# EAGLE board Gibbot v3.b#1 (EAGLE 5.12), part 1 of 2
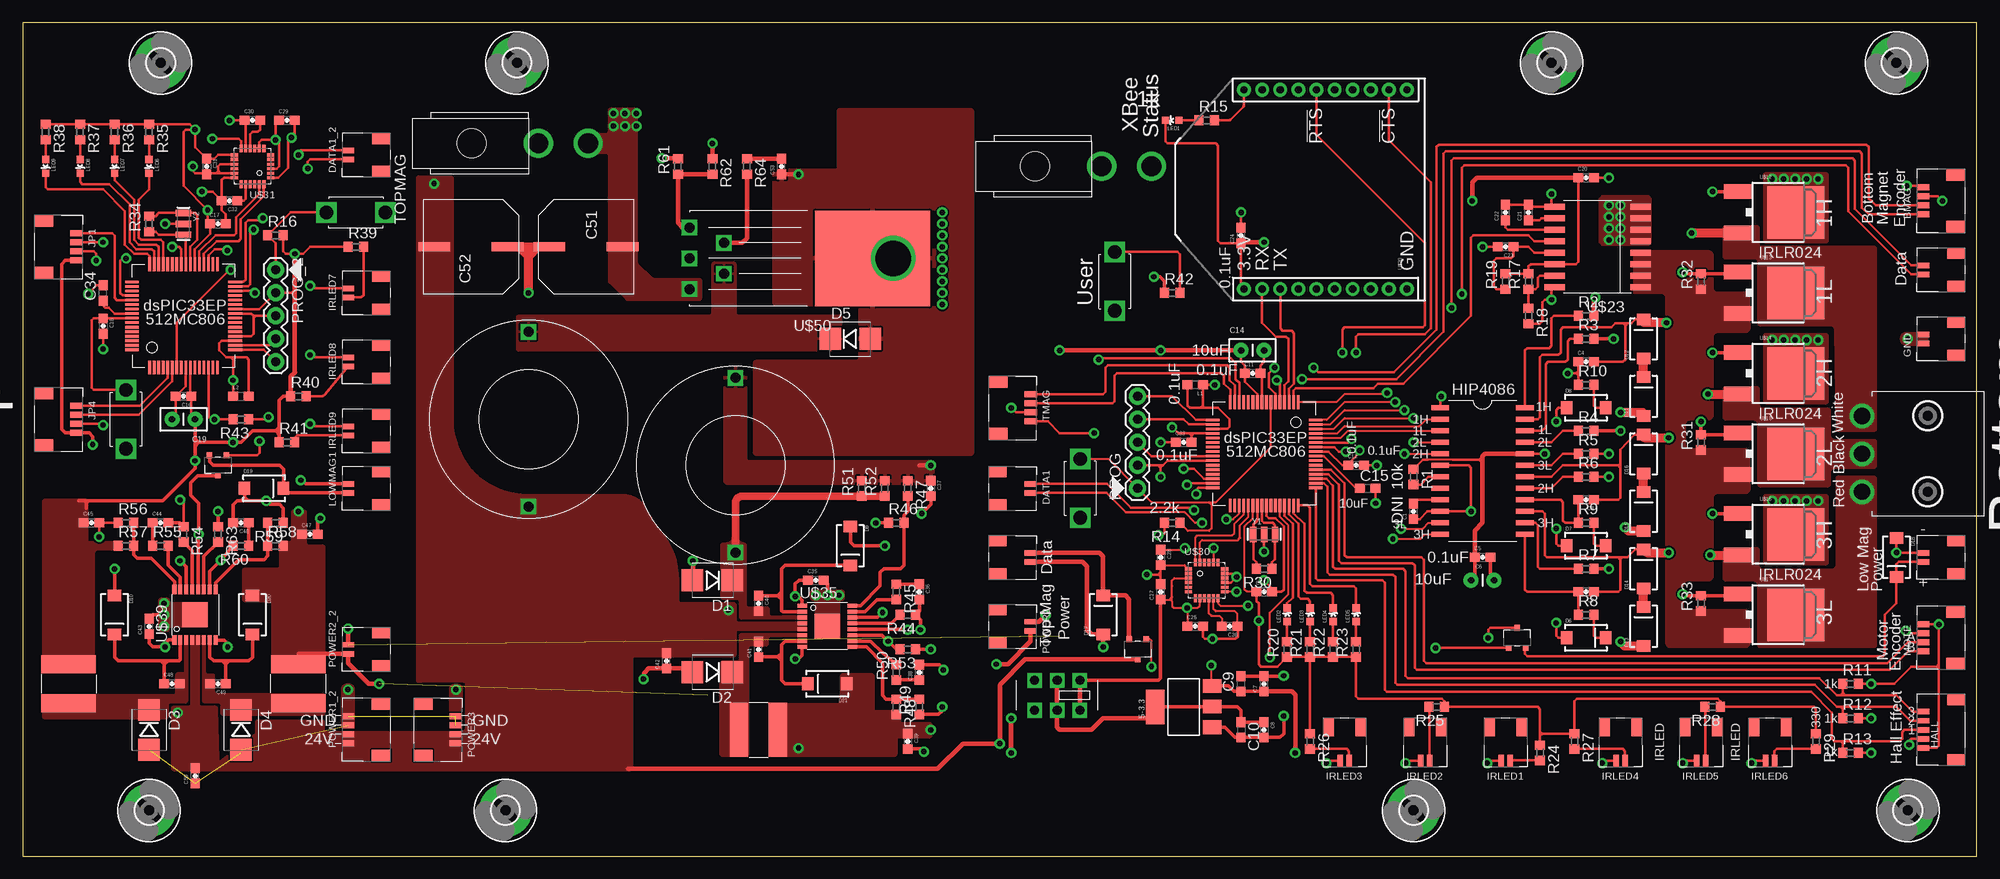
[diagram p0: board, top side]
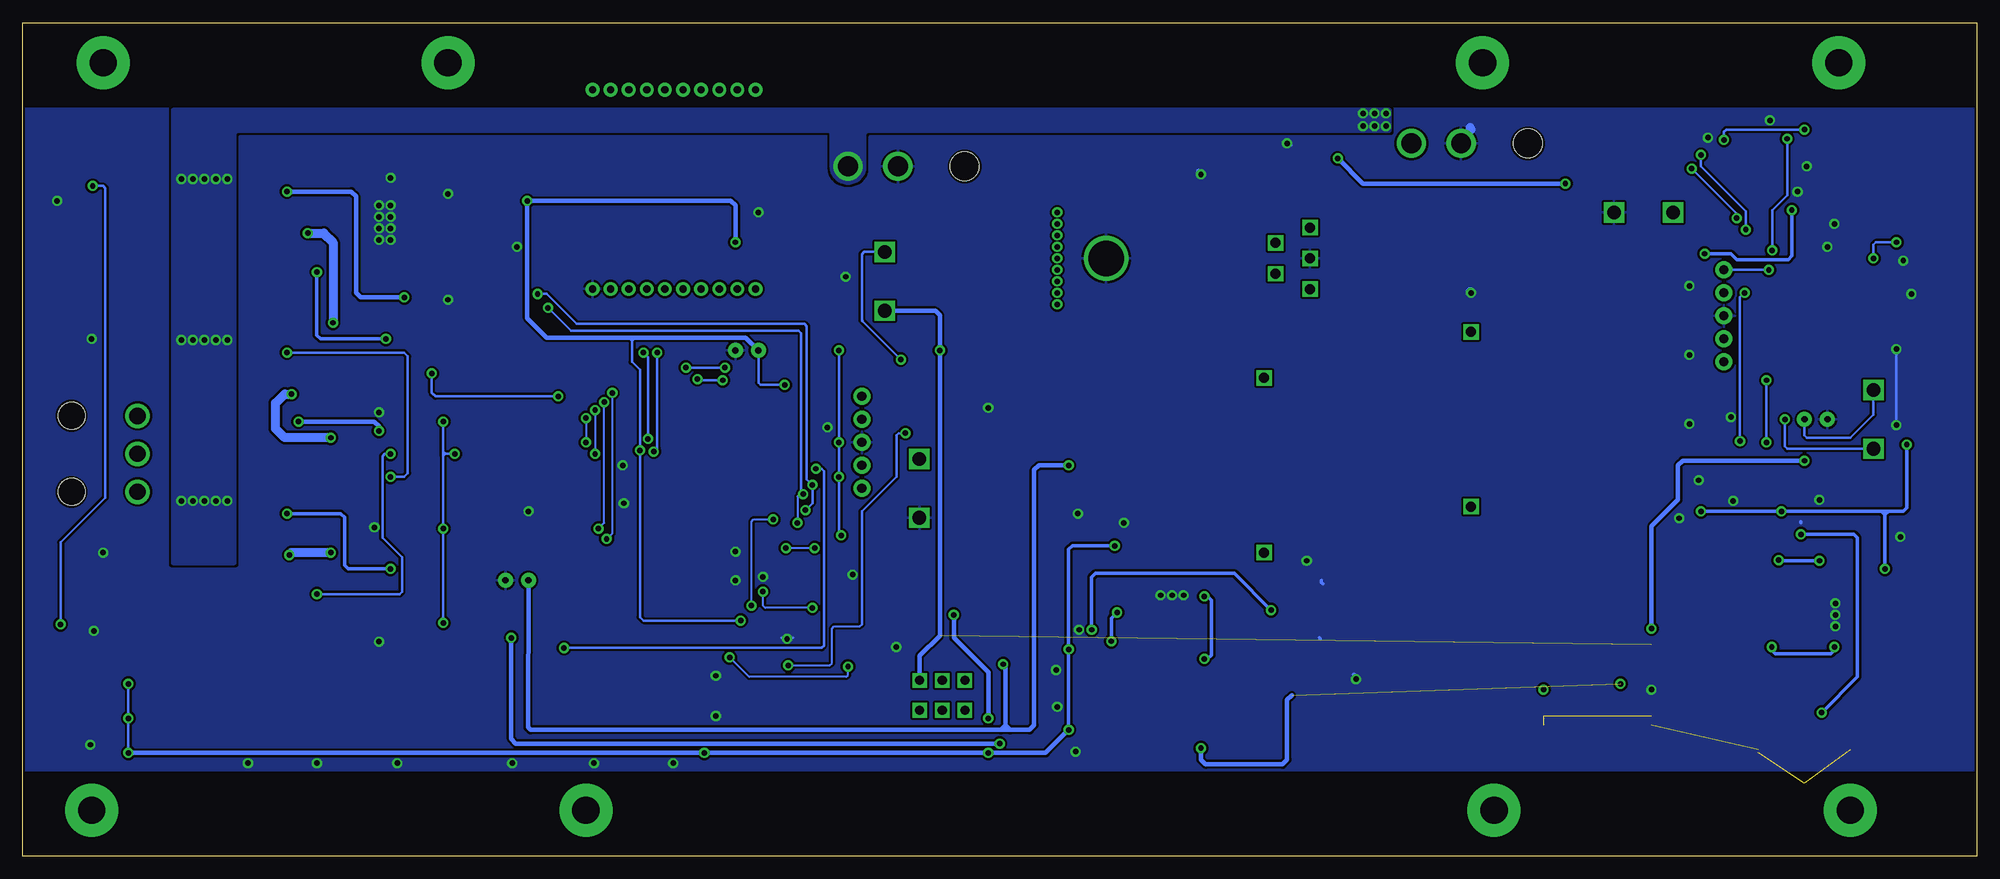
[diagram p1: board, bottom side, seen from below]

Size 215.9 x 92.08 mm. Coordinates in mm from the lower left corner, seen from the top.
Outline: 0,0 215.9,0 215.9,92.08 0,92.08 0,0
Copper layers (1*16): Top 0.035mm / dielectric 1.5mm / Bottom 0.035mm
Design rules "SparkFun": minimum track width 8mil, minimum drill 20mil, track to track 8mil, track to pad 8mil, pad to pad 8mil, via to via 8mil, smd to smd 8mil, copper to edge 10mil, drill to drill 8mil, minimum pad ring 12mil, minimum via ring 10mil, stop-mask expansion 4mil, vias tented up to drill 25mil, thermal gap 10mil
tKeepout: area 0,0 to 214.6,9.5
bKeepout: area 0,82.5 to 214.6,92.1

## Footprints (pad centres in the part's own frame; a part is rotated, then mirrored left to right if it is on the bottom)
SOT223 = smd 1.499 x 2.007: 1 -2.261,-3.15; 2 0.025,-3.15; 3 2.311,-3.15 | smd 3.81 x 2.007: 4 0,3.15
JST-SH-4 = smd 0.65 x 1.36: 1 -1.5,4.68; 2 -0.5,4.68; 3 0.5,4.68; 4 1.5,4.68 | smd 1.3 x 2.1: P$5 2.85,1.05; P$6 -2.85,1.05
SOT23F = smd 0.6 x 0.65: D 0,1.125; G -0.95,-1.125; S 0.95,-1.125
0603-CAP = smd 1.1 x 1: 1 -0.85,0; 2 0.85,0
CAP-PTH-SMALL = drill 0.7 pad 1.651 round: 1 0,0; 2 2.54,0
C0603 = smd 1.1 x 1: 1 -0.85,0; 2 0.85,0
CAP-PTH-SMALL2 = drill 0.7 pad 1.651 round: 1 0,0; 2 2.54,0
EEH-ZA1H101P = smd 1 x 3.5: P$1 0,-4.05; P$2 0,4.05
SMB-DIODE = smd 2.4 x 2.4: A 2.2,0; C -2.2,0
SMA-DIODE = smd 1.27 x 1.47: A -2.15,0; C 2.15,0
JST-SH-2 = smd 0.6 x 1.35: 1 0.5,4.675; 2 -0.5,4.675 | smd 1.2 x 2: P$6 -1.8,1; P$7 1.8,1
3,0-PAD = drill 3 pad 5.842 round: B3,0 0,0
JST-SH-5 = smd 0.6 x 1.35: 1 2,4.675; 2 1,4.675; 3 0,4.675; 4 -1,4.675; 5 -2,4.675 | smd 1.2 x 2: P$6 -3.3,1; P$7 3.3,1
0603 = smd 1.1 x 1: 1 -0.85,0; 2 0.85,0
2100LL-181 = drill 1.1 square: 1 0,9.652; 2 0,-9.652
SRN6045 = smd 2 x 6: P$1 -2.15,0; P$2 2.15,0
LED-0603 = smd 0.8 x 0.8: A 0,-0.75; C 0,0.75
TACTILE_SWITCH = drill 1.5 square: 1 -3.25,0; 2 3.25,0
39-30-3036 = drill 1.803 round: 1 4.191,0; 2 0,0; 3 -4.191,0 | hole 3: -4.204,-7.29; 4.204,-7.29
WM8601 = drill 2.2 round: 1 0,1.1; 2 0,6.6 | hole 3.2: 0,-6.274
1X05 = drill 1.016 pad 1.88 round: 1 0,0; 2 2.54,0; 3 5.08,0; 4 7.62,0; 5 10.16,0
R0603 = smd 1 x 1.1: 1 -0.85,0; 2 0.85,0
TQFP64_10X10 = smd 1.5 x 0.3: 1 -5.7,3.75; 2 -5.7,3.25; 3 -5.7,2.75; 4 -5.7,2.25; 5 -5.7,1.75; 6 -5.7,1.25; 7 -5.7,0.75; 8 -5.7,0.25; 9 -5.7,-0.25; 10 -5.7,-0.75; 11 -5.7,-1.25; 12 -5.7,-1.75; 13 -5.7,-2.25; 14 -5.7,-2.75; 15 -5.7,-3.25; 16 -5.7,-3.75; 33 5.7,-3.75; 34 5.7,-3.25; 35 5.7,-2.75; 36 5.7,-2.25; 37 5.7,-1.75; 38 5.7,-1.25; 39 5.7,-0.75; 40 5.7,-0.25; 41 5.7,0.25; 42 5.7,0.75; 43 5.7,1.25; 44 5.7,1.75; 45 5.7,2.25; 46 5.7,2.75; 47 5.7,3.25; 48 5.7,3.75 | smd 0.3 x 1.5: 17 -3.75,-5.7; 18 -3.25,-5.7; 19 -2.75,-5.7; 20 -2.25,-5.7; 21 -1.75,-5.7; 22 -1.25,-5.7; 23 -0.75,-5.7; 24 -0.25,-5.7; 25 0.25,-5.7; 26 0.75,-5.7; 27 1.25,-5.7; 28 1.75,-5.7; 29 2.25,-5.7; 30 2.75,-5.7; 31 3.25,-5.7; 32 3.75,-5.7; 49 3.75,5.7; 50 3.25,5.7; 51 2.75,5.7; 52 2.25,5.7; 53 1.75,5.7; 54 1.25,5.7; 55 0.75,5.7; 56 0.25,5.7; 57 -0.25,5.7; 58 -0.75,5.7; 59 -1.25,5.7; 60 -1.75,5.7; 61 -2.25,5.7; 62 -2.75,5.7; 63 -3.25,5.7; 64 -3.75,5.7
SOIC24-W = smd 0.533 x 1.981: 1 -6.985,-4.686; 2 -5.715,-4.686; 3 -4.445,-4.686; 4 -3.175,-4.686; 5 -1.905,-4.686; 6 -0.635,-4.686; 7 0.635,-4.686; 8 1.905,-4.686; 9 3.175,-4.686; 10 4.445,-4.686; 11 5.715,-4.686; 12 6.985,-4.686; 13 6.985,4.686; 14 5.715,4.686; 15 4.445,4.686; 16 3.175,4.686; 17 1.905,4.686; 18 0.635,4.686; 19 -0.635,4.686; 20 -1.905,4.686; 21 -3.175,4.686; 22 -4.445,4.686; 23 -5.715,4.686; 24 -6.985,4.686
DPAK = smd 5.791 x 6.274: D 0,1.587 | smd 1.6 x 3: G -2.286,-4.851; S 2.286,-4.851
XBEE-SILK = drill 0.8 pad 1.524 round: 1 -11,20; 2 -11,18; 3 -11,16; 4 -11,14; 5 -11,12; 6 -11,10; 7 -11,8; 8 -11,6; 9 -11,4; 10 -11,2; 11 11,2; 12 11,4; 13 11,6; 14 11,8; 15 11,10; 16 11,12; 17 11,14; 18 11,16; 19 11,18; 20 11,20
SOIC16-W = smd 0.65 x 2.25: 1 -4.445,-4.75; 2 -3.175,-4.75; 3 -1.905,-4.75; 4 -0.635,-4.75; 5 0.635,-4.75; 6 1.905,-4.75; 7 3.175,-4.75; 8 4.445,-4.75; 9 4.445,4.75; 10 3.175,4.75; 11 1.905,4.75; 12 0.635,4.75; 13 -0.635,4.75; 14 -1.905,4.75; 15 -3.175,4.75; 16 -4.445,4.75
LGA24_4X4 = smd 0.8 x 0.35: 1 -2,1.25; 2 -2,0.75; 3 -2,0.25; 4 -2,-0.25; 5 -2,-0.75; 6 -2,-1.25; 13 2,-1.25; 14 2,-0.75; 15 2,-0.25; 16 2,0.25; 17 2,0.75; 18 2,1.25 | smd 0.35 x 0.85: 7 -1.25,-1.975; 8 -0.75,-1.975; 9 -0.25,-1.975; 10 0.25,-1.975; 11 0.75,-1.975; 12 1.25,-1.975; 19 1.25,1.975; 20 0.75,1.975; 21 0.25,1.975; 22 -0.25,1.975; 23 -0.75,1.975; 24 -1.25,1.975
TSSOP16 = smd 0.45 x 1.05: 1 -2.275,-2.775; 2 -1.625,-2.775; 3 -0.975,-2.775; 4 -0.325,-2.775; 5 0.325,-2.775; 6 0.975,-2.775; 7 1.625,-2.775; 8 2.275,-2.775; 9 2.275,2.775; 10 1.625,2.775; 11 0.975,2.775; 12 0.325,2.775; 13 -0.325,2.775; 14 -0.975,2.775; 15 -1.625,2.775; 16 -2.275,2.775 | smd 2.8 x 2.8: 17 0,0
SLIDE_SWITCH = drill 1 square: 1 -2.489,1.651; 2 0,1.651; 3 2.489,1.651; 4 2.489,-1.651; 5 0,-1.651; 6 -2.489,-1.651
TO220-5 = drill 1.1 square: 1 3.81,-3.404; 2 0,-1.702; 3 3.81,0; 4 0,1.702; 5 3.81,3.404 | smd 12.7 x 10.541: PAD -16.434,0 | drill 3.937 round: PAD2 -18.72,0
RESONATOR-SMD = smd 0.7 x 1.7: 1 -1.2,0; 2 0,0; 3 1.2,0

## Placement (x,y rotation side)
5-3.3  REG1117  [SOT223]  128.27,16.51 90 top
BMAG  [JST-SH-4]  214.63,72.39 90 top
BMAGMOS  SSM3K329R  [SOT23F]  165.1,24.13 0 top
BMAGMOS_2  SSM3K329R  [SOT23F]  21.59,43.18 180 top
C1  DNI  [0603-CAP]  153.67,38.1 90 top
C2  .03uF  [0603-CAP]  172.72,29.21 180 top
C3  .03uF  [0603-CAP]  172.72,39.37 180 top
C4  .03uF  [0603-CAP]  172.72,54.61 0 top
C5  .1uF  [0603-CAP]  161.29,33.02 0 top
C6  10uF  [CAP-PTH-SMALL]  160.02,30.48 0 top
C7  0.1uF  [0603-CAP]  137.16,19.05 90 top
C8  0.1uF  [0603-CAP]  137.16,13.97 270 top
C9  10uF  [C0603]  134.62,19.05 90 top
C10  10uF  [C0603]  134.62,13.97 270 top
C11  .1uF  [0603-CAP]  135.89,53.34 0 top
C12  .1uF  [0603-CAP]  147.32,43.18 0 top
C13  .1uF  [0603-CAP]  137.16,29.21 0 top
C14  10uF  [CAP-PTH-SMALL2]  134.62,55.88 0 top
C15  10uF  [C0603]  148.59,40.64 0 top
C16  .1uF  [0603-CAP]  17.78,50.8 180 top
C17  .1uF  [0603-CAP]  21.59,69.85 0 top
C18  .1uF  [0603-CAP]  8.89,58.55 270 top
C19  10uF  [CAP-PTH-SMALL2]  19.05,48.26 180 top
C20  .1uF  [0603-CAP]  172.72,74.93 0 top
C21  1nF  [0603-CAP]  166.37,71.12 90 top
C22  DNI  [0603-CAP]  163.83,71.12 90 top
C23  FAULT  [0603-CAP]  163.83,67.31 180 top
C24  .1uF  [0603-CAP]  134.62,68.58 90 top
C25  10nF  [0603-CAP]  129.54,25.4 0 top
C26  .1uF  [0603-CAP]  133.35,25.4 180 top
C27  .1uF  [0603-CAP]  125.73,29.21 90 top
C28  2.2nF  [0603-CAP]  125.73,33.02 270 top
C29  10nF  [0603-CAP]  29.21,81.28 0 top
C30  .1uF  [0603-CAP]  25.4,81.28 0 top
C31  .1uF  [0603-CAP]  20.32,76.2 270 top
C32  2.2nF  [0603-CAP]  22.86,72.39 180 top
C33  .1uF  [0603-CAP]  128.27,45.72 0 top
C34  10uF  [C0603]  8.89,62.23 90 top
C35  1nF  [0603-CAP]  87.63,30.48 0 top
C36  100pF  [0603-CAP]  99.06,29.21 270 top
C37  4.7uF  [0603-CAP]  100.33,40.64 270 top
C38  100pf  [0603-CAP]  99.06,20.32 90 top
C39  10uF  [0603-CAP]  97.79,12.7 270 top
C40  0.1uF  [0603-CAP]  81.28,27.94 270 top
C41  0.1uF  [0603-CAP]  81.28,22.86 90 top
C42  0.1uF  [0603-CAP]  71.12,21.59 90 top
C43  1nF  [0603-CAP]  13.97,25.4 90 top
C44  150pF  [0603-CAP]  15.24,36.83 0 top
C45  22uF  [0603-CAP]  7.62,36.83 0 top
C46  100pf  [0603-CAP]  24.13,36.83 180 top
C47  10uF  [0603-CAP]  31.75,35.56 0 top
C48  0.22uF  [0603-CAP]  16.51,19.05 0 top
C49  0.22uF  [0603-CAP]  21.59,19.05 180 top
C50  4.7uF  [0603-CAP]  19.05,8.89 90 top
C51  L100uF  [EEH-ZA1H101P]  62.23,67.31 270 top
C52  L100uF  [EEH-ZA1H101P]  49.53,67.31 90 top
C53  .01uF  [0603-CAP]  83.82,76.2 90 top
D1  B260  [SMB-DIODE]  76.2,30.48 180 top
D2  B260  [SMB-DIODE]  76.2,20.32 180 top
D3  B260  [SMB-DIODE]  13.97,13.97 270 top
D4  B260  [SMB-DIODE]  24.13,13.97 270 top
D5  B260  [SMB-DIODE]  91.44,57.15 0 top
D6  ES1B  [SMA-DIODE]  172.72,24.13 0 top
D7  ES1B  [SMA-DIODE]  172.72,34.29 0 top
D8  ES1B  [SMA-DIODE]  172.72,49.53 0 top
D9  ES1B  [SMA-DIODE]  91.44,34.29 270 top
D10  ES1B  [SMA-DIODE]  10.16,26.67 270 top
D11  ES1B  [SMA-DIODE]  179.07,50.8 90 top
D12  ES1B  [SMA-DIODE]  179.07,57.15 90 top
D13  ES1B  [SMA-DIODE]  179.07,25.4 90 top
D14  ES1B  [SMA-DIODE]  179.07,31.75 90 top
D15  ES1B  [SMA-DIODE]  179.07,38.1 90 top
D16  ES1B  [SMA-DIODE]  179.07,44.45 90 top
D17  ES1B  [SMA-DIODE]  119.38,26.67 90 top
D18  ES1B  [SMA-DIODE]  207.01,33.02 270 top
D19  ES1B  [SMA-DIODE]  26.67,40.64 0 top
D20  ES1B  [SMA-DIODE]  25.4,26.67 270 top
D21  ES1B  [SMA-DIODE]  88.9,19.05 180 top
DATA1  [JST-SH-2]  106.68,40.64 270 top
DATA1_2  [JST-SH-2]  40.64,77.47 90 top
DATA2  [JST-SH-2]  214.63,64.77 90 top
GND  [JST-SH-2]  214.63,57.15 90 top
H1  MOUNT-PAD-ROUND3.0  [3,0-PAD]  153.67,5.08 0 top
H2  MOUNT-PAD-ROUND3.0  [3,0-PAD]  208.28,5.08 0 top
H3  MOUNT-PAD-ROUND3.0  [3,0-PAD]  207.01,87.63 0 top
H4  MOUNT-PAD-ROUND3.0  [3,0-PAD]  168.91,87.63 0 top
H5  MOUNT-PAD-ROUND3.0  [3,0-PAD]  53.34,5.08 0 top
H6  MOUNT-PAD-ROUND3.0  [3,0-PAD]  54.61,87.63 0 top
H7  MOUNT-PAD-ROUND3.0  [3,0-PAD]  15.24,87.63 0 top
H8  MOUNT-PAD-ROUND3.0  [3,0-PAD]  13.97,5.08 0 top
HALL  [JST-SH-5]  214.63,13.97 90 top
IRLED1  [JST-SH-2]  163.83,15.24 180 top
IRLED2  [JST-SH-2]  154.94,15.24 180 top
IRLED3  [JST-SH-2]  146.05,15.24 180 top
IRLED4  [JST-SH-2]  176.53,15.24 180 top
IRLED5  [JST-SH-2]  185.42,15.24 180 top
IRLED6  [JST-SH-2]  193.04,15.24 180 top
IRLED7  [JST-SH-2]  40.64,62.23 90 top
IRLED8  [JST-SH-2]  40.64,54.61 90 top
IRLED9  [JST-SH-2]  40.64,46.99 90 top
JP1  [JST-SH-4]  1.27,67.31 270 top
JP4  [JST-SH-4]  1.27,48.26 270 top
L1  DNI  [0603]  129.54,52.07 180 top
L2  DNI  [0603]  24.13,50.8 0 top
L3  56uH  [2100LL-181]  78.74,43.18 0 top
L4  6.8uH  [SRN6045]  81.28,13.97 0 top
L5  6.8uH  [SRN6045]  5.08,19.05 270 top
L6  10uH  [SRN6045]  30.48,19.05 90 top
L7  180uH  [2100LL-181]  55.88,48.26 0 top
LED1  [LED-0603]  127,81.28 90 top
LED2  [LED-0603]  139.7,26.67 0 top
LED3  [LED-0603]  142.24,26.67 0 top
LED4  [LED-0603]  144.78,26.67 0 top
LED5  [LED-0603]  147.32,26.67 0 top
LED6  [LED-0603]  13.97,76.2 180 top
LED7  [LED-0603]  10.16,76.2 180 top
LED8  [LED-0603]  6.35,76.2 180 top
LED9  [LED-0603]  2.54,76.2 180 top
LOWMAG  [JST-SH-2]  214.63,33.02 90 top
LOWMAG1  [JST-SH-2]  40.64,40.64 90 top
MAINRESET  TACTILE_SWITCH  [TACTILE_SWITCH]  116.84,40.64 270 top
MAINUSER  TACTILE_SWITCH  [TACTILE_SWITCH]  120.65,63.5 90 top
MOT  [39-30-3036]  203.2,44.45 90 top
MOTE  [JST-SH-4]  214.63,24.13 90 top
POWER1  [WM8601]  118.11,76.2 270 top
POWER1_2  [JST-SH-4]  40.64,13.97 90 top
POWER2  [JST-SH-2]  106.68,25.4 270 top
POWER2_2  [JST-SH-2]  40.64,22.86 90 top
POWER3  [JST-SH-4]  43.18,13.97 270 top
POWER4  [WM8601]  55.88,78.74 270 top
PROG  [1X05]  123.19,40.64 90 top
PROG_2  [1X05]  27.94,64.77 270 top
R1  10k  [R0603]  153.67,41.91 270 top
R2  10ohm  [R0603]  172.72,59.69 0 top
R3  10ohm  [R0603]  172.72,57.15 0 top
R4  10ohm  [R0603]  172.72,46.99 0 top
R5  10ohm  [R0603]  172.72,44.45 0 top
R6  10ohm  [R0603]  172.72,41.91 0 top
R7  10ohm  [R0603]  172.72,31.75 0 top
R8  0ohm  [R0603]  172.72,26.67 0 top
R9  0ohm  [R0603]  172.72,36.83 0 top
R10  0ohm  [R0603]  172.72,52.07 0 top
R11  1k  [R0603]  201.93,19.05 0 top
R12  1k  [R0603]  201.93,15.24 0 top
R13  1k  [R0603]  201.93,11.43 0 top
R14  2.2k  [R0603]  127,36.83 180 top
R15  1k  [R0603]  130.81,81.28 0 top
R16  2.2k  [R0603]  27.94,68.58 0 top
R17  VOC1  [R0603]  166.37,63.5 90 top
R18  VOC2  [R0603]  166.37,59.69 270 top
R19  330k  [R0603]  163.83,63.5 90 top
R20  1k  [R0603]  139.7,22.86 90 top
R21  1k  [R0603]  142.24,22.86 90 top
R22  1k  [R0603]  144.78,22.86 90 top
R23  1k  [R0603]  147.32,22.86 90 top
R24  330  [R0603]  167.64,11.43 270 top
R25  330  [R0603]  156.21,16.51 180 top
R26  330  [R0603]  142.24,12.7 270 top
R27  330  [R0603]  171.45,12.7 270 top
R28  330  [R0603]  186.69,16.51 180 top
R29  330  [R0603]  198.12,12.7 270 top
R30  1M  [R0603]  137.16,31.75 180 top
R31  20k  [R0603]  185.42,45.72 90 top
R32  20k  [R0603]  185.42,63.5 90 top
R33  20k  [R0603]  185.42,27.94 90 top
R34  1M  [R0603]  13.97,69.85 90 top
R35  1k  [R0603]  13.97,80.01 270 top
R36  1k  [R0603]  10.16,80.01 270 top
R37  1k  [R0603]  6.35,80.01 270 top
R38  1k  [R0603]  2.54,80.01 270 top
R39  330  [R0603]  36.83,67.31 0 top
R40  330  [R0603]  30.48,50.8 0 top
R41  330  [R0603]  29.21,45.72 0 top
R42  2.2k  [R0603]  127,62.23 0 top
R43  2.2k  [R0603]  24.13,48.26 180 top
R44  33.2k  [R0603]  97.79,26.67 180 top
R45  43k  [R0603]  96.52,29.21 270 top
R46  11k  [R0603]  96.52,36.83 0 top
R47  154k  [R0603]  97.79,40.64 270 top
R48  56.2k  [R0603]  96.52,16.51 270 top
R49  10.7k  [R0603]  99.06,16.51 90 top
R50  39k  [R0603]  96.52,20.32 90 top
R51  2.2k  [R0603]  92.71,40.64 90 top
R52  2.2k  [R0603]  95.25,40.64 90 top
R53  100k  [R0603]  97.79,22.86 180 top
R54  52.3k  [R0603]  17.78,35.56 270 top
R55  51k  [R0603]  15.24,34.29 0 top
R56  11.5k  [R0603]  11.43,36.83 0 top
R57  35.7k  [R0603]  11.43,34.29 0 top
R58  56.2k  [R0603]  27.94,34.29 0 top
R59  10.7k  [R0603]  27.94,36.83 180 top
R60  43k  [R0603]  24.13,34.29 180 top
R61  9.79k  [R0603]  72.39,76.2 90 top
R62  2.21k  [R0603]  76.2,76.2 270 top
R63  100k  [R0603]  21.59,35.56 270 top
R64  2.7k  [R0603]  80.01,76.2 270 top
SECRESET  TACTILE_SWITCH  [TACTILE_SWITCH]  36.83,71.12 0 top
SECUSER  TACTILE_SWITCH  [TACTILE_SWITCH]  11.43,48.26 270 top
TMAG  [JST-SH-4]  106.68,49.53 270 top
TMAGMOS  SSM3K329R  [SOT23F]  123.19,22.86 180 top
TOPMAG  [JST-SH-2]  106.68,33.02 270 top
U$1  DSPIC33EP512MC806  [TQFP64_10X10]  137.16,44.45 270 top
U$2  HIP4086  [SOIC24-W]  161.29,42.55 270 top
U$12  IRLR024  [DPAK]  194.31,71.12 270 top
U$13  IRLR024  [DPAK]  194.31,62.23 270 top
U$14  IRLR024  [DPAK]  194.31,53.34 270 top
U$15  IRLR024  [DPAK]  194.31,44.45 270 top
U$16  IRLR024  [DPAK]  194.31,35.56 270 top
U$17  IRLR024  [DPAK]  194.31,26.67 270 top
U$20  XBEE-1B2  [XBEE-SILK]  154.94,73.66 90 top
U$22  DSPIC33EP512MC806  [TQFP64_10X10]  17.78,59.69 90 top
U$23  ACS716  [SOIC16-W]  173.99,67.31 90 top
U$30  MPU-9150  [LGA24_4X4]  130.81,30.48 0 top
U$31  MPU-9150  [LGA24_4X4]  25.4,76.2 180 top
U$35  LT3508  [TSSOP16]  88.9,25.4 270 top
U$38  SLIDE_SWTHROUGHHOLE  [SLIDE_SWITCH]  114.3,17.78 180 top
U$39  LT3508  [TSSOP16]  19.05,26.67 0 top
U$50  LT1074HV  [TO220-5]  77.47,66.04 180 top
Y1  RESONATORSMD  [RESONATOR-SMD]  137.16,35.56 0 top
Y2  RESONATORSMD  [RESONATOR-SMD]  17.78,69.85 270 top

## Library data of the parts
5-3.3 BMAG BMAGMOS BMAGMOS_2 C1-C53 D1-D21 DATA1 DATA1_2 DATA2 GND H1-H8 HALL IRLED1-IRLED9 JP1 JP4 L1-L7 LED1-LED9 LOWMAG LOWMAG1 MAINRESET MAINUSER MOT MOTE POWER1 POWER1_2 POWER2 POWER2_2 POWER3 POWER4 PROG PROG_2 R1-R64 SECRESET SECUSER TMAG TMAGMOS TOPMAG U$1 U$2 U$12-U$17 U$20 U$22 U$23 U$30 U$31 U$35 U$38 U$39 U$50 Y1 Y2 = Gibbot

## Nets
1HO: R2.2 U$12.G
1HS: C4.2 D12.C MOT.1 U$2.23 U$12.S U$13.D
1LO: R3.2 R32.2 U$13.G
2HO: R6.2 U$14.G
2HS: C3.1 D16.C MOT.2 U$2.18 U$14.S U$15.D
2LO: R4.2 R31.2 U$15.G
3.3V: C11.1 C12.1 C13.1 C14.1 C16.1 C17.1 C18.1 C19.1 C20.1 C24.1 C25.1 C27.1 C29.1 C31.1 C33.1 C45.1 L1.1 L1.2 L2.1 L2.2 L5.P$1 LED1.C MAINUSER.1 POWER2_2.1 PROG.2 PROG_2.2 R14.2 R16.2 R17.2 R19.2 R20.1 R21.1 R22.1 R23.1 R24.1 R25.1 R26.1 R27.1 R28.1 R29.1 R35.1 R36.1 R37.1 R38.1 R39.1 R40.1 R41.1 R57.1 SECUSER.1 U$1.10 U$1.19 U$1.26 U$1.38 U$1.57 U$20.1 U$22.10 U$22.19 U$22.26 U$22.38 U$22.57 U$23.14 U$30.3 U$30.8 U$30.9 U$30.13 U$31.3 U$31.8 U$31.9 U$31.13 U$38.1 U$38.6
3HO: R7.2 U$16.G
3HS: C2.1 D14.C MOT.3 U$2.15 U$16.S U$17.D
3LO: R5.2 R33.2 U$17.G
5V: 5-3.3.3 BMAG.4 C7.1 C9.1 C39.1 C47.1 D9.A D10.A D20.A D21.A HALL.5 JP1.4 JP4.4 L4.P$2 L6.P$2 MOTE.4 POWER2.2 POWER2_2.2 R11.2 R12.2 R13.2 R48.2 R53.1 R58.2 R63.1 TMAG.4
12V: C5.1 C6.1 C37.1 D6.A D7.A D8.A L3.1 POWER2.1 R1.1 R47.1 R51.2 R52.2 U$2.20
24V: BMAGMOS.D BMAGMOS_2.D C42.2 C50.2 C52.P$2 L7.2 POWER1_2.1 POWER1_2.2 POWER3.3 POWER3.4 R61.2 TMAGMOS.D U$35.4 U$35.5 U$35.12 U$39.4 U$39.5 U$39.12
48V: C51.P$2 POWER1.2 POWER4.2 U$12.D U$14.D U$16.D U$50.5
CTS: U$1.59 U$20.12
GND: 5-3.3.1 BMAG.3 C1.1 C5.2 C6.2 C7.2 C8.2 C9.2 C10.2 C11.2 C12.2 C13.2 C14.2 C15.2 C16.2 C17.2 C18.2 C19.2 C20.2 C21.2 C22.2 C23.2 C24.2 C25.2 C26.1 C27.2 C28.2 C29.2 C30.1 C31.2 C32.2 C33.2 C34.2 C35.2 C36.2 C37.2 C38.2 C39.2 C42.1 C43.2 C44.2 C45.2 C46.2 C47.2 C50.1 C51.P$1 C52.P$1 C53.1 D1.A D2.A D3.A D4.A D5.A D11.A D13.A D15.A D17.A D18.A D19.A GND.1 GND.2 HALL.4 IRLED1.1 IRLED2.1 IRLED3.1 IRLED4.1 IRLED5.1 IRLED6.1 IRLED7.1 IRLED8.1 IRLED9.1 JP1.3 JP4.3 LOWMAG1.1 LOWMAG.1 MAINRESET.2 MOTE.3 POWER1.1 POWER1_2.3 POWER1_2.4 POWER3.1 POWER3.2 POWER4.1 PROG.3 PROG_2.3 R18.2 R42.1 R43.1 R44.1 R46.1 R49.1 R54.1 R56.1 R59.1 R62.1 SECRESET.2 TMAG.3 TOPMAG.1 U$1.9 U$1.20 U$1.25 U$1.41 U$2.6 U$2.10 U$20.10 U$22.9 U$22.20 U$22.25 U$22.41 U$23.5 U$23.6 U$23.7 U$23.8 U$23.9 U$23.16 U$30.1 U$30.11 U$30.15 U$30.17 U$30.18 U$31.1 U$31.11 U$31.15 U$31.17 U$31.18 U$35.17 U$39.17 U$50.3 U$50.PAD U$50.PAD2 Y1.2 Y2.2
HALL1: HALL.3 R13.1 U$1.49
HALL2: HALL.2 R12.1 U$1.50
HALL3: HALL.1 R11.1 U$1.51
I_SENSE: U$1.2 U$23.12
IMU_INT1: U$1.35 U$30.12
IMU_INT2: U$22.35 U$31.12
IRLED6: IRLED6.2 R29.2
LED1: LED2.C U$1.45
LED1_2: LED6.C U$22.45
LED2: LED3.C U$1.46
LED2_2: LED7.C U$22.46
LED3: LED4.C U$1.47
LED3_2: LED8.C U$22.47
LED4: LED5.C U$1.48
LED4_2: LED9.C U$22.48
LOW_MAG: BMAGMOS.G U$1.30
LOW_MAG_2: BMAGMOS_2.G U$22.30
MAG1A: TMAG.2 U$1.16
MAG1B: TMAG.1 U$1.15
MAG2A: BMAG.2 U$1.6
MAG2A_2: JP4.2 U$22.6
MAG2B: BMAG.1 U$1.5
MAG2B_2: JP4.1 U$22.5
MCLR1: MAINRESET.1 PROG.1 R14.1 U$1.7
MCLR_2: PROG_2.1 R16.1 SECRESET.1 U$22.7
MOTA: MOTE.2 U$1.53
MOTA_2: JP1.2 U$22.52
MOTB: MOTE.1 U$1.52
MOTB_2: JP1.1 U$22.53
N$4: R1.2 U$2.7
N$5: C1.2 U$2.9
N$6: R2.1 U$2.24
N$7: R3.1 U$2.22
N$8: R4.1 U$2.21
N$9: R5.1 U$2.19
N$10: R6.1 U$2.17
N$11: R7.1 U$2.14
N$12: C2.2 R8.1 U$2.13
N$13: C3.2 R9.1 U$2.16
N$14: R15.2 U$20.20
N$15: LED1.A R15.1
N$16: C15.1 U$1.56
N$17: C4.1 R10.1 U$2.1
N$18: D8.C R10.2
N$19: D7.C R9.2
N$20: D6.C R8.2
N$21: D11.C D12.A
N$22: D13.C D14.A
N$23: D15.C D16.A
N$24: C23.1 R19.1 U$23.13
N$25: C21.1 U$23.10
N$26: R44.2 U$35.13
N$27: C22.1 U$23.11
N$28: R31.1 R32.1 R33.1 U$13.S U$15.S U$17.S U$23.1 U$23.2 U$23.3 U$23.4
N$29: LED2.A R20.2
N$30: LED3.A R21.2
N$31: LED4.A R22.2
N$32: R17.1 R18.1 U$23.15
N$34: U$1.13
N$35: C34.1 U$22.56
N$36: R34.2 U$22.39 Y2.1
N$37: R34.1 U$22.40 Y2.3
N$38: C36.1 R45.1
N$39: LED5.A R23.2
N$40: D17.C TMAGMOS.S TOPMAG.2
N$41: BMAGMOS.S D18.C LOWMAG.2
N$42: R30.2 U$1.39 Y1.1
N$43: R30.1 U$1.40 Y1.3
N$44: C26.2 U$30.10
N$45: IRLED1.2 R24.2
N$46: C28.1 U$30.20
N$47: IRLED2.2 R25.2
N$48: C30.2 U$31.10
N$49: IRLED3.2 R26.2
N$50: C32.1 U$31.20
N$51: IRLED4.2 R27.2
N$52: BMAGMOS_2.S D19.C LOWMAG1.2
N$53: IRLED5.2 R28.2
N$54: C35.1 U$35.1 U$35.8
N$55: LED6.A R35.2
N$56: 5-3.3.2 5-3.3.4 C8.1 C10.1 U$38.2 U$38.5
N$58: LED7.A R36.2
N$59: LED8.A R37.2
N$60: LED9.A R38.2
N$61: IRLED7.2 R39.2
N$62: IRLED8.2 R40.2
N$63: IRLED9.2 R41.2
N$64: R45.2 U$35.15
N$65: R48.1 R49.2 U$35.9
N$66: R46.2 R47.2 U$35.16
N$67: R53.2 U$35.11 U$35.14
N$68: C38.1 R50.1
N$69: R50.2 U$35.10
N$70: C41.2 D2.C L4.P$1 U$35.6
N$71: D5.C L7.1 U$50.4
N$72: C40.2 D1.C L3.2 R51.1 R52.1 U$35.3
N$73: C40.1 D9.C U$35.2
N$74: C41.1 D21.C U$35.7
N$75: R64.2 U$50.2
N$76: R54.2 U$39.13
N$77: C43.1 U$39.1 U$39.8
N$78: C44.1 R55.1
N$79: R55.2 U$39.15
N$80: R56.2 R57.2 U$39.16
N$81: R58.1 R59.2 U$39.9
N$82: R63.2 U$39.11
N$83: C46.1 R60.1
N$84: R60.2 U$39.10 U$39.14
N$85: C53.2 R64.1
N$86: C48.2 D3.C L5.P$2 U$39.3
N$87: C48.1 D10.C U$39.2
N$88: C49.2 D4.C L6.P$1 U$39.6
N$89: C49.1 D20.C U$39.7
N$91: R61.1 R62.2 U$50.1
PGEC1: PROG.5 U$1.17
PGEC_2: PROG_2.5 U$22.17
PGED1: PROG.4 U$1.18
PGED_2: PROG_2.4 U$22.18
PWM1H: U$1.61 U$2.2
PWM1L: U$1.60 U$2.3
PWM2H: U$1.63 U$2.5
PWM2L: U$1.62 U$2.4
PWM3H: U$1.1 U$2.12
PWM3L: U$1.64 U$2.11
RTS: U$1.58 U$20.16
RX: U$1.4 U$20.2
SCL1: U$1.37 U$30.23
SCL1_2: U$22.37 U$31.23
SCL2: DATA1.1 DATA2.1 U$1.32
SCL2_2: DATA1_2.1 U$22.31
SDA1: U$1.36 U$30.24
SDA1_2: U$22.36 U$31.24
SDA2: DATA1.2 DATA2.2 U$1.31
SDA2_2: DATA1_2.2 U$22.32
TOP_MAG: TMAGMOS.G U$1.44
TX: U$1.3 U$20.3
USER: MAINUSER.2 R42.2 U$1.14
USER_2: R43.2 SECUSER.2 U$22.14